# EAGLE board panel (EAGLE 9.4.2)
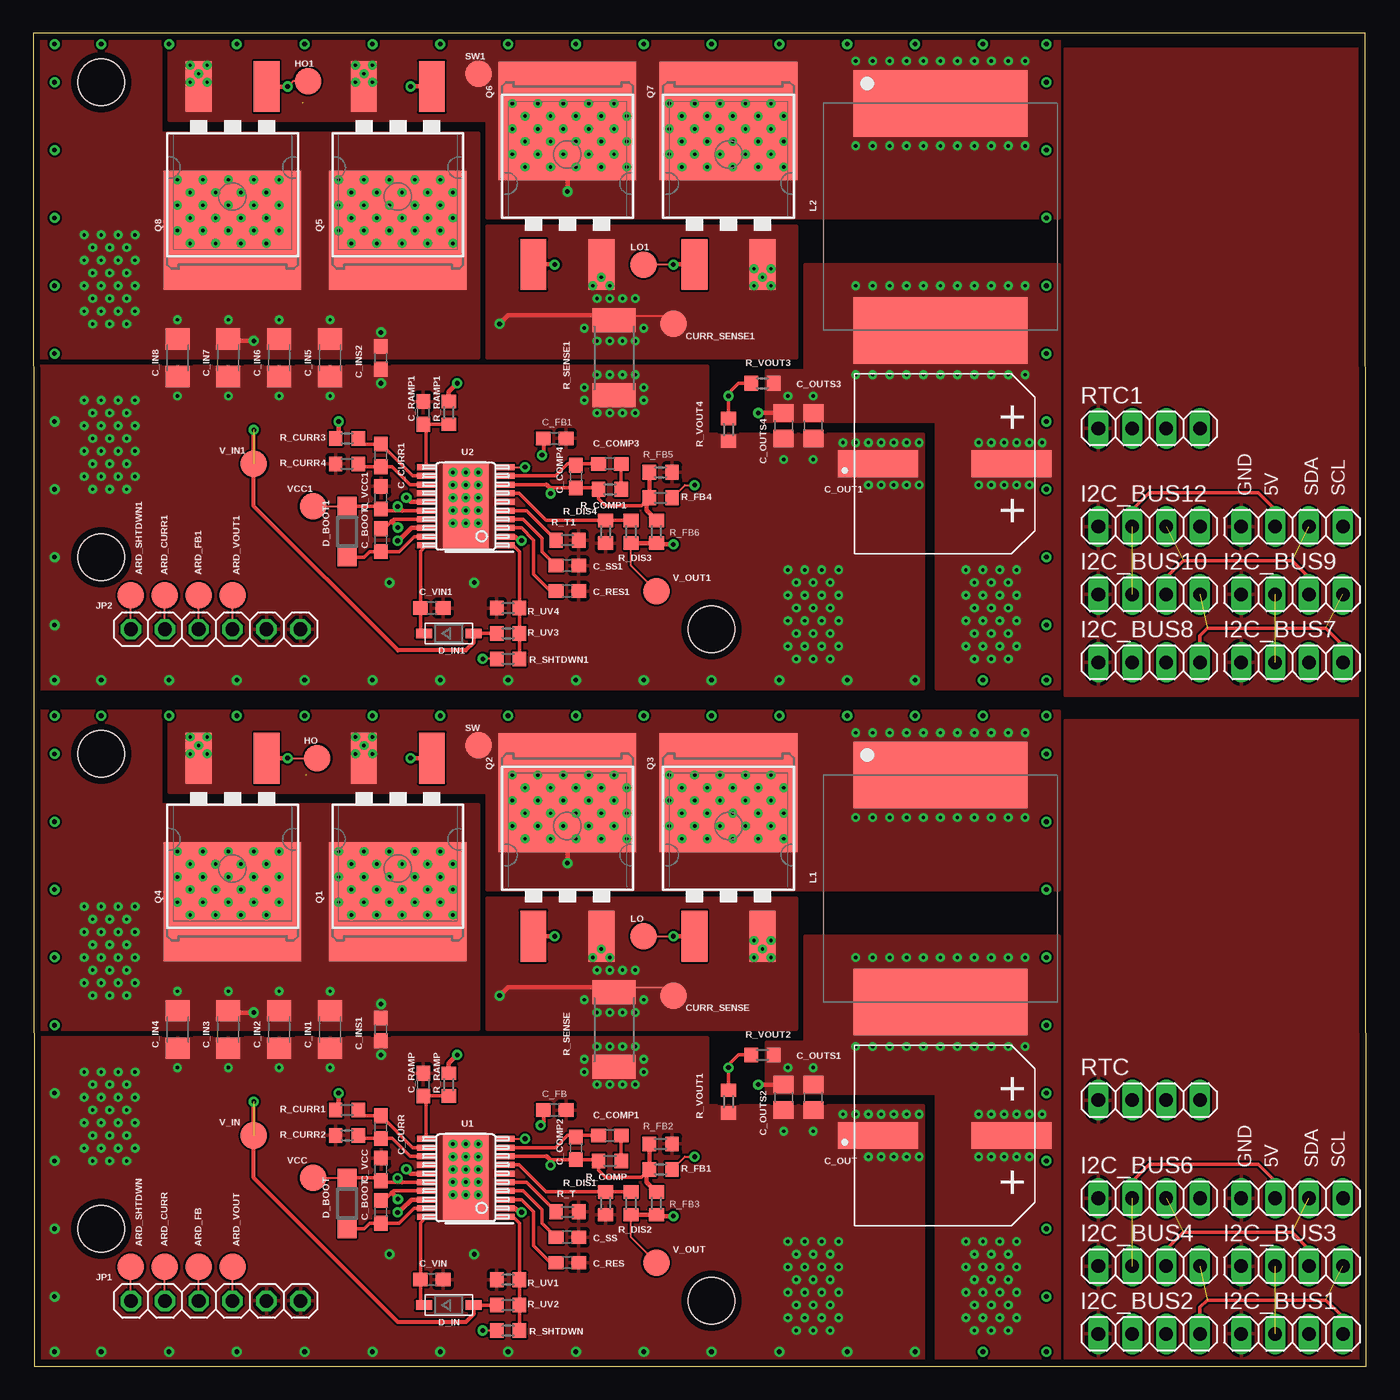
[diagram p0: board, top side]
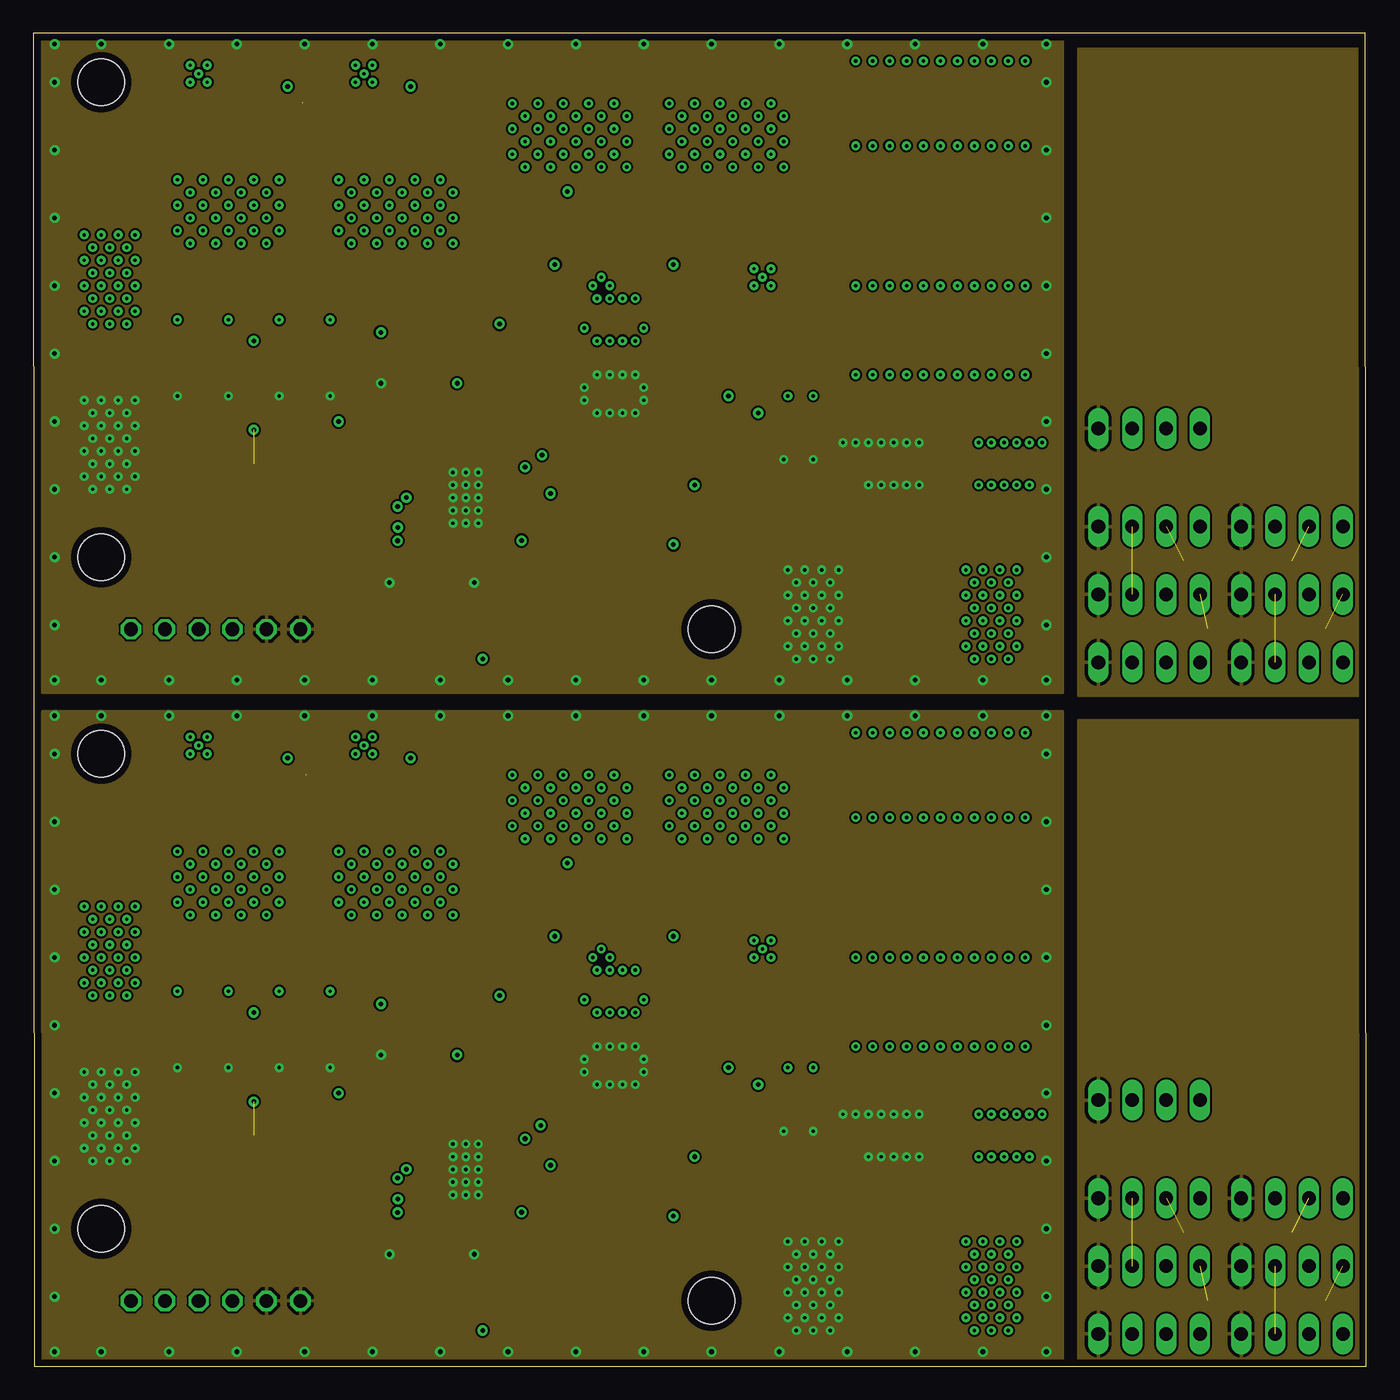
[diagram p1: board, inner layer Route2]
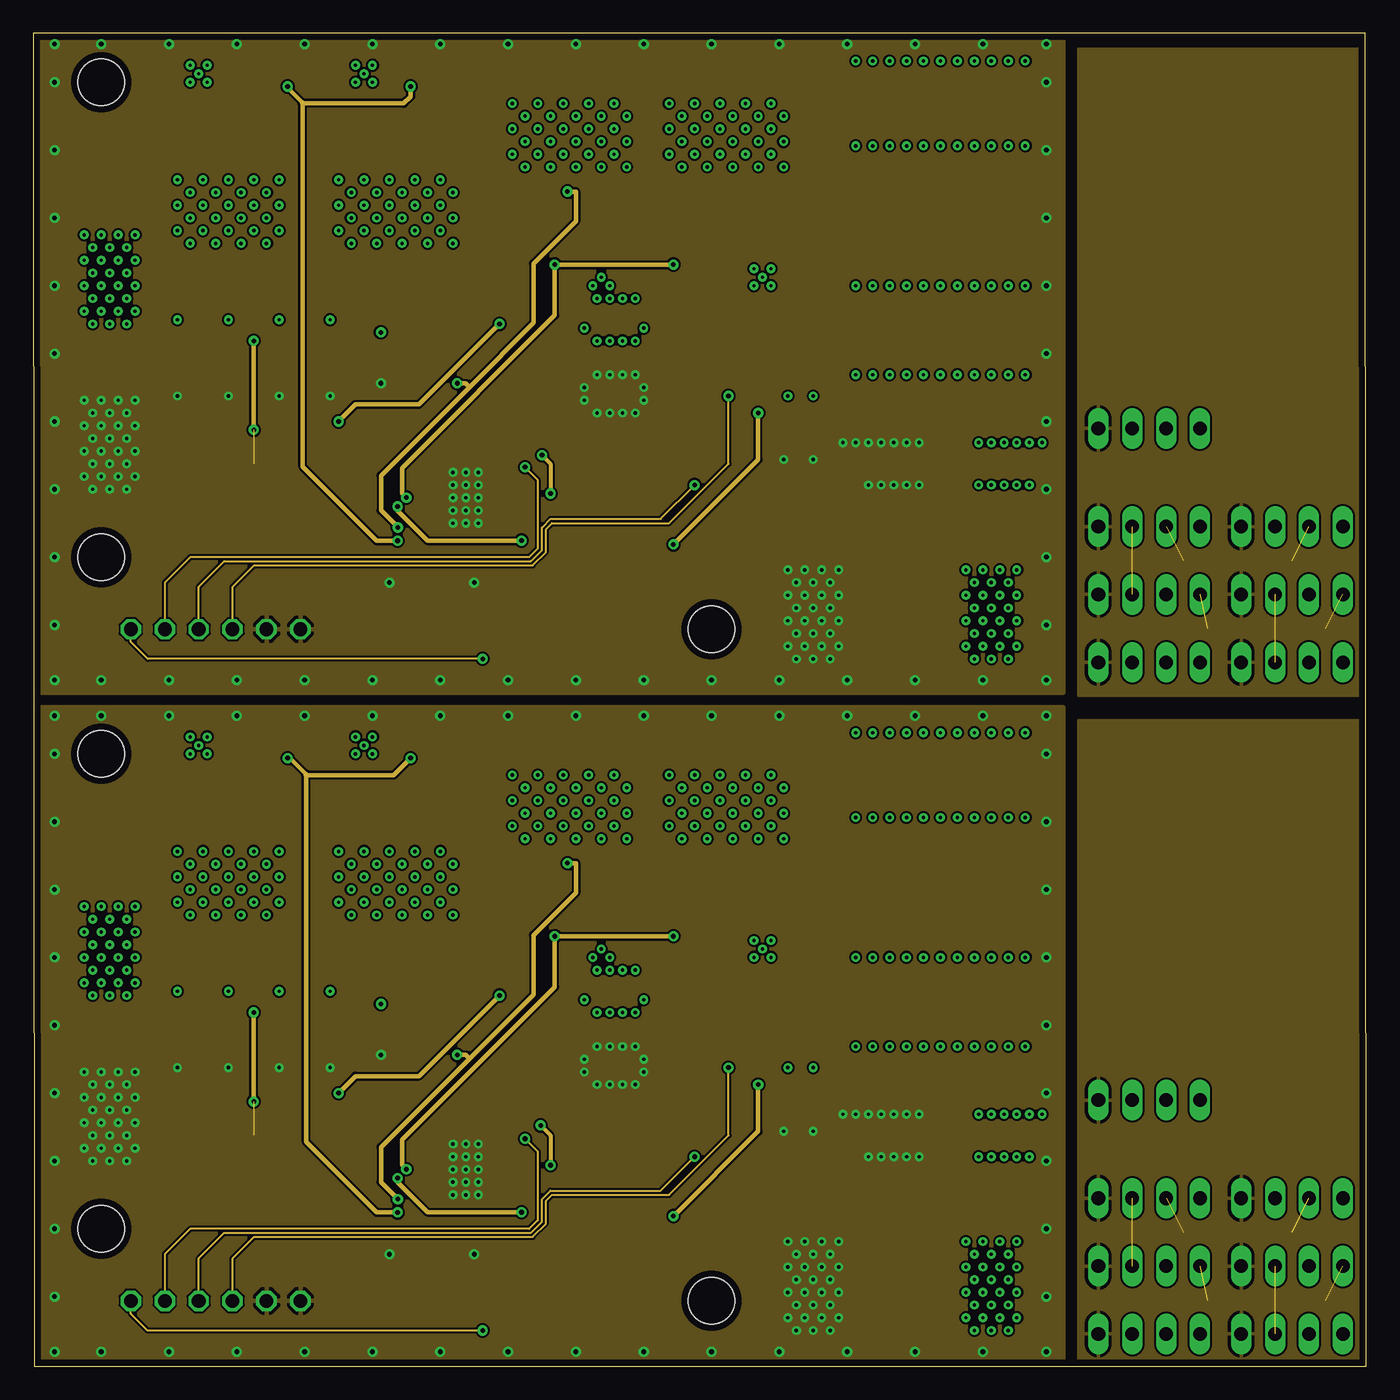
[diagram p2: board, inner layer Route15]
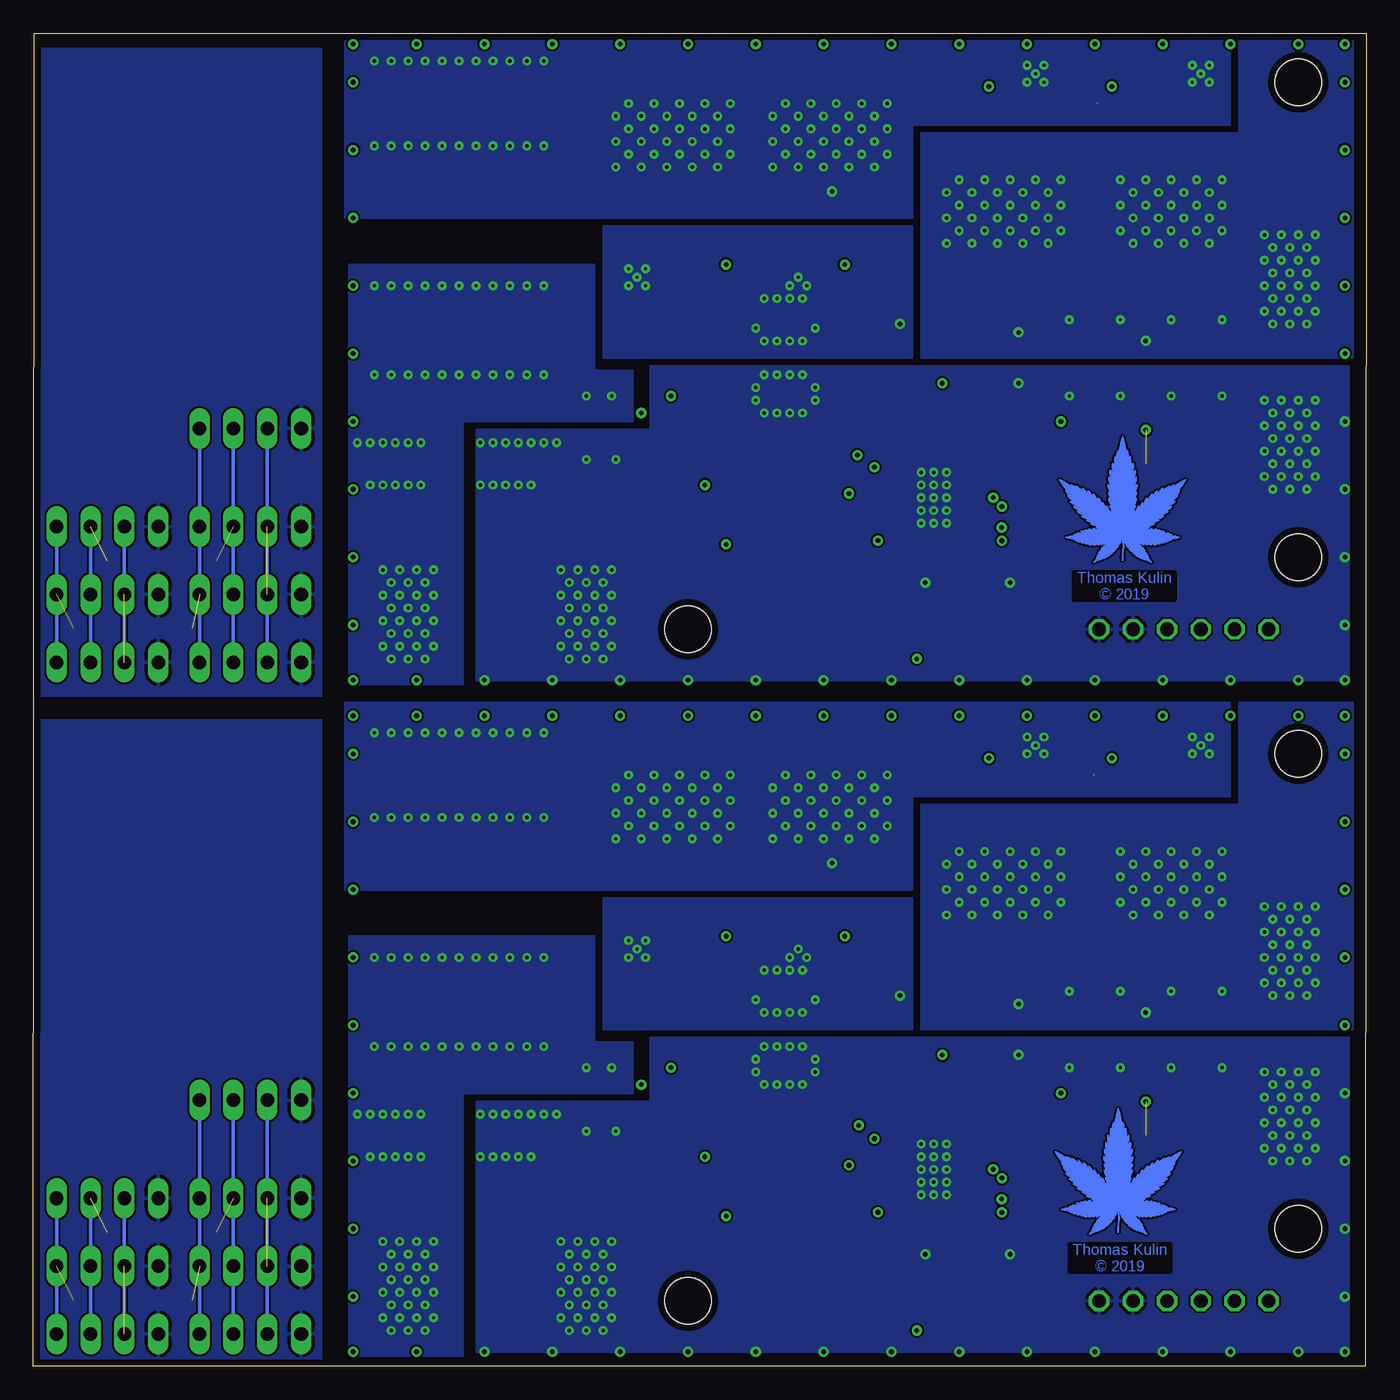
[diagram p3: board, bottom side, seen from below]

Size 99.83 x 99.82 mm. Coordinates in mm from the lower left corner, seen from the top.
Outline: 0.05,0 99.83,0 99.78,99.82 0,99.82 0.05,0
Copper layers (1+2*15+16): Top 0.035mm / dielectric 1.5mm / Route2 0.035mm / dielectric 0.15mm / Route15 0.035mm / dielectric 0.2mm / Bottom 0.035mm
Design rules "default *": minimum track width 6mil, minimum drill 0.2mm, track to track 6mil, track to pad 6mil, pad to pad 6mil, via to via 6mil, smd to smd 6mil, copper to edge 20mil, drill to drill 6mil, minimum pad ring 10mil, minimum via ring 8mil, stop-mask expansion 4mil, vias tented up to drill 0mil, thermal gap 10mil
Holes 3.48 mm at 50.8,4.91 5.08,45.87 5.08,10.31 50.8,55.2 5.08,96.16 5.08,60.6

## Footprints (pad centres in the part's own frame; a part is rotated, then mirrored left to right if it is on the bottom)
TP20R = smd 2 x 2: TP 0,0
C0603 = smd 1.1 x 1: 1 -0.85,0; 2 0.85,0
C1206 = smd 1.6 x 1.8: 1 -1.4,0; 2 1.4,0
CAP_PANASONIC_H13 = smd 6 x 2: P$1 -5,0; P$2 5,0
C0805 = smd 1.3 x 1.5: 1 -0.95,0; 2 0.95,0
SOD123 = smd 1.4 x 1.4: A 1.9,0; C -1.9,0
SOD-123 = smd 1.2 x 0.7: A 1.85,0; C -1.85,0
1X04 = drill 1.016 long: 1 -3.81,0; 2 -1.27,0; 3 1.27,0; 4 3.81,0
1X06 = drill 1.016 octagon: 1 -6.35,0; 2 -3.81,0; 3 -1.27,0; 4 1.27,0; 5 3.81,0; 6 6.35,0
17.5X17.5_INDUCTOR_SMD = smd 5 x 13: 1 0,0; 2 17,0
D2PAK = smd 1.93 x 3.81: 1 -2.55,-8.25; 3 2.55,-8.25 | smd 10.3 x 8.9: 2 0,2.5
R0603 = smd 1 x 1.1: 1 -0.85,0; 2 0.85,0
R2512 = smd 1.8 x 3.2: 1 -2.8,0; 2 2.8,0
PWP0020A = smd 1.4 x 0.45: 1 -2.95,2.925; 2 -2.95,2.275; 3 -2.95,1.625; 4 -2.95,0.975; 5 -2.95,0.325; 6 -2.95,-0.325; 7 -2.95,-0.975; 8 -2.95,-1.625; 9 -2.95,-2.275; 10 -2.95,-2.925; 11 2.95,-2.925; 12 2.95,-2.275; 13 2.95,-1.625; 14 2.95,-0.975; 15 2.95,-0.325; 16 2.95,0.325; 17 2.95,0.975; 18 2.95,1.625; 19 2.95,2.275; 20 2.95,2.925 | smd 3.4 x 6.5: 21 0,0

## Placement (x,y rotation side)
ARD_CURR  PTR1TP20R  [TP20R]  9.84,7.45 0 top
ARD_CURR1  PTR1TP20R  [TP20R]  9.84,57.74 0 top
ARD_FB  PTR1TP20R  [TP20R]  12.38,7.45 0 top
ARD_FB1  PTR1TP20R  [TP20R]  12.38,57.74 0 top
ARD_SHTDWN  PTR1TP20R  [TP20R]  7.3,7.45 0 top
ARD_SHTDWN1  PTR1TP20R  [TP20R]  7.3,57.74 0 top
ARD_VOUT  PTR1TP20R  [TP20R]  14.92,7.45 0 top
ARD_VOUT1  PTR1TP20R  [TP20R]  14.92,57.74 0 top
C_BOOT  470 nF 50V  [C0603]  26.04,11.58 90 top
C_BOOT1  470 nF 50V  [C0603]  26.04,61.87 90 top
C_COMP1  1.2 nF  [C0603]  43.18,17.29 0 top
C_COMP2  82 pF  [C0603]  40.64,16.34 270 top
C_COMP3  1.2 nF  [C0603]  43.18,67.58 0 top
C_COMP4  82 pF  [C0603]  40.64,66.63 270 top
C_CURR  100 pF  [C0603]  26.04,17.93 270 top
C_CURR1  100 pF  [C0603]  26.04,68.22 270 top
C_FB  0.68 uF  [C0603]  39.05,19.2 0 top
C_FB1  0.68 uF  [C0603]  39.05,69.49 0 top
C_IN1  10 uF  [C1206]  22.23,25.23 270 top
C_IN2  10 uF  [C1206]  18.41,25.23 270 top
C_IN3  10 uF  [C1206]  14.61,25.23 270 top
C_IN4  10 uF  [C1206]  10.79,25.23 270 top
C_IN5  10 uF  [C1206]  22.23,75.52 270 top
C_IN6  10 uF  [C1206]  18.41,75.52 270 top
C_IN7  10 uF  [C1206]  14.61,75.52 270 top
C_IN8  10 uF  [C1206]  10.79,75.52 270 top
C_INS1  100 nF  [C0603]  26.04,25.23 270 top
C_INS2  100 nF  [C0603]  26.04,75.52 270 top
C_OUT  470 uF  [CAP_PANASONIC_H13]  68.26,17.29 0 top
C_OUT1  470 uF  [CAP_PANASONIC_H13]  68.26,67.58 0 top
C_OUTS1  1 uF  [C0805]  58.42,20.15 270 top
C_OUTS2  1 uF  [C0805]  56.2,20.15 270 top
C_OUTS3  1 uF  [C0805]  58.42,70.44 270 top
C_OUTS4  1 uF  [C0805]  56.2,70.44 270 top
C_RAMP  820pF 50V  [C0603]  29.21,21.1 90 top
C_RAMP1  820pF 50V  [C0603]  29.21,71.39 90 top
C_RES  1 uF  [C0603]  40.01,7.77 0 top
C_RES1  1 uF  [C0603]  40.01,58.06 0 top
C_SS  100 nF  [C0603]  40.01,9.67 0 top
C_SS1  100 nF  [C0603]  40.01,59.96 0 top
C_VCC  1 UF  [C0603]  26.04,14.75 90 top
C_VCC1  1 UF  [C0603]  26.04,65.04 90 top
C_VIN  1 UF  [C0603]  29.84,6.5 0 top
C_VIN1  1 UF  [C0603]  29.84,56.79 0 top
CURR_SENSE  PTR1TP20R  [TP20R]  47.94,27.77 0 top
CURR_SENSE1  PTR1TP20R  [TP20R]  47.94,78.06 0 top
D_BOOT  PMEG10010ELRX  [SOD123]  23.5,12.21 90 top
D_BOOT1  PMEG10010ELRX  [SOD123]  23.5,62.5 90 top
D_IN  IN4148  [SOD-123]  31.11,4.59 0 top
D_IN1  IN4148  [SOD-123]  31.11,54.88 0 top
HO  PTR1TP20R  [TP20R]  21.27,45.55 0 top
HO1  PTR1TP20R  [TP20R]  20.57,96.24 0 top
I2C_BUS1  [1X04]  94.28,2.43 0 top
I2C_BUS2  [1X04]  83.58,2.43 0 top
I2C_BUS3  [1X04]  94.28,7.51 0 top
I2C_BUS4  [1X04]  83.58,7.51 0 top
I2C_BUS5  [1X04]  94.28,12.59 0 top
I2C_BUS6  [1X04]  83.58,12.59 0 top
I2C_BUS7  [1X04]  94.28,52.72 0 top
I2C_BUS8  [1X04]  83.58,52.72 0 top
I2C_BUS9  [1X04]  94.28,57.8 0 top
I2C_BUS10  [1X04]  83.58,57.8 0 top
I2C_BUS11  [1X04]  94.28,62.88 0 top
I2C_BUS12  [1X04]  83.58,62.88 0 top
JP1  [1X06]  13.65,4.91 0 top
JP2  [1X06]  13.65,55.2 0 top
L1  [17.5X17.5_INDUCTOR_SMD]  67.94,44.28 270 top
L2  [17.5X17.5_INDUCTOR_SMD]  67.94,94.57 270 top
LO  PTR1TP20R  [TP20R]  45.72,32.21 0 top
LO1  PTR1TP20R  [TP20R]  45.72,82.51 0 top
Q1  IRF3205STRLPBF  [D2PAK]  27.3,37.29 180 top
Q2  IRF3205STRLPBF  [D2PAK]  40.01,40.47 0 top
Q3  IRF3205STRLPBF  [D2PAK]  52.07,40.47 0 top
Q4  IRF3205STRLPBF  [D2PAK]  14.92,37.29 180 top
Q5  IRF3205STRLPBF  [D2PAK]  27.3,87.59 180 top
Q6  IRF3205STRLPBF  [D2PAK]  40.01,90.76 0 top
Q7  IRF3205STRLPBF  [D2PAK]  52.07,90.76 0 top
Q8  IRF3205STRLPBF  [D2PAK]  14.92,87.59 180 top
R_COMP  28.7 K  [R0603]  43.18,15.39 0 top
R_COMP1  28.7 K  [R0603]  43.18,65.68 0 top
R_CURR1  100  [R0603]  23.5,19.2 180 top
R_CURR2  100  [R0603]  23.5,17.29 180 top
R_CURR3  100  [R0603]  23.5,69.49 180 top
R_CURR4  100  [R0603]  23.5,67.58 180 top
R_DIS1  3.3 K  [R0603]  42.86,12.21 270 top
R_DIS2  56 K  [R0603]  44.77,12.21 270 top
R_DIS3  56 K  [R0603]  44.77,62.5 270 top
R_DIS4  3.3 K  [R0603]  42.86,62.5 270 top
R_FB1  17 K  [R0603]  46.99,14.75 180 top
R_FB2  10 K  [R0603]  46.99,16.66 180 top
R_FB3  178 K  [R0603]  46.67,12.21 270 top
R_FB4  17 K  [R0603]  46.99,65.04 180 top
R_FB5  10 K  [R0603]  46.99,66.95 180 top
R_FB6  178 K  [R0603]  46.67,62.5 270 top
R_RAMP  180 KOhm  [R0603]  31.11,21.1 90 top
R_RAMP1  180 KOhm  [R0603]  31.11,71.39 90 top
R_SENSE  1W 5mOhm  [R2512]  43.5,25.23 270 top
R_SENSE1  1W 5mOhm  [R2512]  43.5,75.52 270 top
R_SHTDWN  1 K  [R0603]  35.56,2.69 0 top
R_SHTDWN1  1 K  [R0603]  35.56,52.98 0 top
R_T  12.1 K  [R0603]  40.01,11.58 180 top
R_T1  12.1 K  [R0603]  40.01,61.87 180 top
R_UV1  3.3 K  [R0603]  35.56,6.5 180 top
R_UV2  56 K  [R0603]  35.56,4.59 180 top
R_UV3  56 K  [R0603]  35.56,54.88 180 top
R_UV4  3.3 K  [R0603]  35.56,56.79 180 top
R_VOUT1  1 K  [R0603]  52.07,19.83 90 top
R_VOUT2  5 K  [R0603]  54.61,23.32 0 top
R_VOUT3  5 K  [R0603]  54.61,73.62 0 top
R_VOUT4  1 K  [R0603]  52.07,70.12 90 top
RTC  [1X04]  83.58,19.94 0 top
RTC1  [1X04]  83.58,70.23 0 top
SW  PTR1TP20R  [TP20R]  33.34,46.5 0 top
SW1  PTR1TP20R  [TP20R]  33.34,96.79 0 top
U1  Value  [PWP0020A]  32.38,14.12 180 top
U2  Value  [PWP0020A]  32.38,64.41 180 top
V_IN  PTR1TP20R  [TP20R]  16.51,17.29 0 top
V_IN1  PTR1TP20R  [TP20R]  16.51,67.58 0 top
V_OUT  PTR1TP20R  [TP20R]  46.67,7.77 0 top
V_OUT1  PTR1TP20R  [TP20R]  46.67,58.06 0 top
VCC  PTR1TP20R  [TP20R]  20.95,14.12 0 top
VCC1  PTR1TP20R  [TP20R]  20.95,64.41 0 top

## Library data of the parts
ARD_CURR ARD_CURR1 ARD_FB ARD_FB1 ARD_SHTDWN ARD_SHTDWN1 ARD_VOUT ARD_VOUT1 CURR_SENSE CURR_SENSE1 HO HO1 LO LO1 SW SW1 V_IN V_IN1 V_OUT V_OUT1 VCC VCC1 = testpad
C_BOOT C_BOOT1 C_IN4 C_IN8 C_OUTS1-C_OUTS4 C_RAMP C_RAMP1 C_VCC C_VCC1 C_VIN C_VIN1 = rcl; SPICEPREFIX: C
C_COMP1-C_COMP4 C_CURR C_CURR1 C_FB C_FB1 C_IN1-C_IN3 C_IN5-C_IN7 C_INS1 C_INS2 C_RES C_RES1 C_SS C_SS1 R_COMP R_COMP1 R_CURR1-R_CURR4 R_DIS1-R_DIS4 R_FB1-R_FB6 R_SHTDWN R_SHTDWN1 R_T R_T1 R_UV1-R_UV4 R_VOUT1-R_VOUT4 = rcl
C_OUT C_OUT1 L1 L2 = custom-parts
D_BOOT D_BOOT1 = diode
D_IN D_IN1 JP1 JP2 = adafruit
I2C_BUS1-I2C_BUS12 RTC RTC1 = pinhead
Q1-Q8 = mixed_components
R_RAMP R_RAMP1 R_SENSE R_SENSE1 = rcl; SPICEPREFIX: R
U1 U2 = AcceleratedDesigns_Lib; MANUFACTURER: Texas Instruments; PARTNUMBER: LM5117PMHXNOPB; REFDES: RefDes; TYPE: TYPE

## Nets
5V: I2C_BUS1.2 I2C_BUS2.2 I2C_BUS3.2 I2C_BUS4.2 I2C_BUS5.2 I2C_BUS6.2 RTC.2
5V1: I2C_BUS7.2 I2C_BUS8.2 I2C_BUS9.2 I2C_BUS10.2 I2C_BUS11.2 I2C_BUS12.2 RTC1.2
ARD_CURRENT: ARD_CURR.TP JP1.2 U1.10
ARD_CURRENT1: ARD_CURR1.TP JP2.2 U2.10
ARD_FEEDBACK: ARD_FB.TP JP1.3 R_FB1.1
ARD_FEEDBACK1: ARD_FB1.TP JP2.3 R_FB4.1
ARD_SHUTDOWN: ARD_SHTDWN.TP JP1.1 R_SHTDWN.1
ARD_SHUTDOWN1: ARD_SHTDWN1.TP JP2.1 R_SHTDWN1.1
ARD_VOUT: ARD_VOUT.TP JP1.4 R_VOUT1.2 R_VOUT2.1
ARD_VOUT1: ARD_VOUT1.TP JP2.4 R_VOUT3.1 R_VOUT4.2
GND: C_FB.2 C_IN1.2 C_IN2.2 C_IN3.2 C_IN4.2 C_INS1.2 C_OUT.P$1 C_OUTS1.2 C_OUTS2.2 C_RAMP.2 C_RES.2 C_SS.2 C_VCC.2 C_VIN.2 JP1.5 JP1.6 R_CURR2.2 R_DIS1.2 R_FB2.1 R_SENSE.2 R_T.1 R_UV1.2 R_VOUT1.1 U1.6 U1.14 U1.21
GND1: C_FB1.2 C_IN5.2 C_IN6.2 C_IN7.2 C_IN8.2 C_INS2.2 C_OUT1.P$1 C_OUTS3.2 C_OUTS4.2 C_RAMP1.2 C_RES1.2 C_SS1.2 C_VCC1.2 C_VIN1.2 JP2.5 JP2.6 R_CURR4.2 R_DIS4.2 R_FB5.1 R_SENSE1.2 R_T1.1 R_UV4.2 R_VOUT4.1 U2.6 U2.14 U2.21
GND2: I2C_BUS1.1 I2C_BUS2.1 I2C_BUS3.1 I2C_BUS4.1 I2C_BUS5.1 I2C_BUS6.1 RTC.1
GND3: I2C_BUS7.1 I2C_BUS8.1 I2C_BUS9.1 I2C_BUS10.1 I2C_BUS11.1 I2C_BUS12.1 RTC1.1
N$1: C_VCC.1 D_BOOT.A U1.2 U1.16 VCC.TP
N$2: C_BOOT.1 D_BOOT.C U1.19
N$3: C_BOOT.2 L1.1 Q1.3 Q2.2 Q3.2 Q4.3 R_RAMP.2 SW.TP U1.17
N$4: CURR_SENSE.TP Q2.3 Q3.3 R_CURR1.2 R_SENSE.1
N$5: C_RAMP.1 R_RAMP.1 U1.11
N$6: C_VCC1.1 D_BOOT1.A U2.2 U2.16 VCC1.TP
N$7: LO.TP Q2.1 Q3.1 U1.15
N$8: HO.TP Q1.1 Q4.1 U1.18
N$9: C_COMP1.2 R_COMP.2
N$10: C_VIN.1 D_IN.C U1.20
N$11: R_SHTDWN.2 R_UV1.1 R_UV2.1 U1.1
N$12: C_BOOT1.1 D_BOOT1.C U2.19
N$13: R_DIS1.1 R_DIS2.1 U1.7
N$14: C_COMP1.1 C_COMP2.1 U1.9
N$15: C_COMP2.2 C_FB.1 R_COMP.1 R_FB1.2 R_FB2.2 R_FB3.1 U1.8
N$16: R_T.2 U1.5
N$17: C_RES.1 U1.3
N$18: C_SS.1 U1.4
N$19: C_CURR.1 R_CURR1.1 U1.12
N$20: C_CURR.2 R_CURR2.1 U1.13
N$21: C_IN1.1 C_IN2.1 C_IN3.1 C_IN4.1 C_INS1.1 D_IN.A Q1.2 Q4.2 R_UV2.2 V_IN.TP
N$22: C_BOOT1.2 L2.1 Q5.3 Q6.2 Q7.2 Q8.3 R_RAMP1.2 SW1.TP U2.17
N$23: CURR_SENSE1.TP Q6.3 Q7.3 R_CURR3.2 R_SENSE1.1
N$24: C_RAMP1.1 R_RAMP1.1 U2.11
N$25: LO1.TP Q6.1 Q7.1 U2.15
N$26: HO1.TP Q5.1 Q8.1 U2.18
N$27: R_SHTDWN1.2 R_UV3.1 R_UV4.1 U2.1
N$28: R_DIS3.1 R_DIS4.1 U2.7
N$29: C_COMP3.2 R_COMP1.2
N$30: C_COMP3.1 C_COMP4.1 U2.9
N$31: C_COMP4.2 C_FB1.1 R_COMP1.1 R_FB4.2 R_FB5.2 R_FB6.1 U2.8
N$32: R_T1.2 U2.5
N$33: C_SS1.1 U2.4
N$34: C_RES1.1 U2.3
N$35: C_CURR1.1 R_CURR3.1 U2.12
N$36: C_CURR1.2 R_CURR4.1 U2.13
N$37: C_VIN1.1 D_IN1.C U2.20
N$38: C_IN5.1 C_IN6.1 C_IN7.1 C_IN8.1 C_INS2.1 D_IN1.A Q5.2 Q8.2 R_UV3.2 V_IN1.TP
SCL: I2C_BUS1.4 I2C_BUS2.4 I2C_BUS3.4 I2C_BUS4.4 I2C_BUS5.4 I2C_BUS6.4 RTC.4
SCL1: I2C_BUS7.4 I2C_BUS8.4 I2C_BUS9.4 I2C_BUS10.4 I2C_BUS11.4 I2C_BUS12.4 RTC1.4
SDA: I2C_BUS1.3 I2C_BUS2.3 I2C_BUS3.3 I2C_BUS4.3 I2C_BUS5.3 I2C_BUS6.3 RTC.3
SDA1: I2C_BUS7.3 I2C_BUS8.3 I2C_BUS9.3 I2C_BUS10.3 I2C_BUS11.3 I2C_BUS12.3 RTC1.3
V_OUT: C_OUT.P$2 C_OUTS1.1 C_OUTS2.1 L1.2 R_DIS2.2 R_FB3.2 R_VOUT2.2 V_OUT.TP
V_OUT1: C_OUT1.P$2 C_OUTS3.1 C_OUTS4.1 L2.2 R_DIS3.2 R_FB6.2 R_VOUT3.2 V_OUT1.TP

## Tracks (layer width: path | path; a pad name or v marks a point on that pad's centre or on a via)
5V  (2 unrouted)
  Top 0.254: I2C_BUS6.2 82.31,13.86 83.58,15.13 91.74,15.13 93.01,13.86 I2C_BUS5.2
  Bottom 0.254: I2C_BUS2.2 I2C_BUS6.2 RTC.2 | I2C_BUS5.2 I2C_BUS1.2
5V1  (2 unrouted)
  Top 0.254: I2C_BUS12.2 82.31,64.15 83.58,65.42 91.74,65.42 93.01,64.15 I2C_BUS11.2
  Bottom 0.254: I2C_BUS8.2 I2C_BUS12.2 RTC1.2 | I2C_BUS11.2 I2C_BUS7.2
ARD_CURRENT  (via drill 0.35)
  Top 0.152: U1.10 v36.83,17.05 | JP1.2 ARD_CURR.TP
  Route15 0.152: v36.83,17.05 37.78,16.1 37.78,10.94 37.15,10.31 11.75,10.31 9.84,8.4 JP1.2
ARD_CURRENT1  (via drill 0.35)
  Top 0.152: U2.10 v36.83,67.34 | JP2.2 ARD_CURR1.TP
  Route15 0.152: v36.83,67.34 37.78,66.39 37.78,61.23 37.15,60.6 11.75,60.6 9.84,58.69 JP2.2
ARD_FEEDBACK  (via drill 0.35)
  Top 0.152: R_FB1.1 48.79,15.7 v49.53,15.7 | JP1.3 ARD_FB.TP
  Route15 0.152: JP1.3 12.38,8.08 14.3,10 37.27,10 38.09,10.82 38.09,12.52 38.73,13.16 46.99,13.16 v49.53,15.7
ARD_FEEDBACK1  (via drill 0.35)
  Top 0.152: R_FB4.1 48.79,66 v49.53,66 | JP2.3 ARD_FB1.TP
  Route15 0.152: JP2.3 12.38,58.38 14.3,60.29 37.27,60.29 38.09,61.11 38.09,62.81 38.73,63.46 46.99,63.46 v49.53,66
ARD_SHUTDOWN  (via drill 0.35)
  Top 0.152: R_SHTDWN.1 v33.66,2.69 | JP1.1 ARD_SHTDWN.TP
  Route15 0.152: v33.66,2.69 8.57,2.69 7.3,3.96 JP1.1
ARD_SHUTDOWN1  (via drill 0.35)
  Top 0.152: R_SHTDWN1.1 v33.66,52.98 | JP2.1 ARD_SHTDWN1.TP
  Route15 0.152: v33.66,52.98 8.57,52.98 7.3,54.25 JP2.1
ARD_VOUT  (via drill 0.35)
  Top 0.152: JP1.4 ARD_VOUT.TP
  Top 0.254: R_VOUT2.1 52.81,23.32 52.07,22.59 v52.07,22.37 R_VOUT1.2
  Route15 0.152: JP1.4 14.92,8.08 16.54,9.7 37.4,9.7 38.39,10.69 38.39,12.39 38.85,12.85 47.62,12.85 52.07,17.29 v52.07,22.37
ARD_VOUT1  (via drill 0.35)
  Top 0.152: JP2.4 ARD_VOUT1.TP
  Top 0.254: R_VOUT3.1 52.81,73.62 52.07,72.88 v52.07,72.66 R_VOUT4.2
  Route15 0.152: JP2.4 14.92,58.38 16.54,59.99 37.4,59.99 38.39,60.98 38.39,62.68 38.85,63.14 47.62,63.14 52.07,67.58 v52.07,72.66
GND  (via drill 0.25, 0.35)
  other vias: 1.59,1.1 5.08,1.1 10.16,1.1 15.24,1.1 20.32,1.1 25.4,1.1 1.59,5.23 1.59,10.31 1.59,15.39 30.48,1.1 35.56,1.1 40.64,1.1 45.72,1.1 50.8,1.1 55.88,1.1 60.96,1.1 66.04,1.1 71.12,1.1 75.88,1.1 75.88,5.23 75.88,10.31 75.88,15.39 75.88,20.47 75.88,25.55 75.88,30.63 75.88,35.71 75.88,40.79 75.88,45.87 1.59,20.47 1.59,25.55 1.59,30.63 1.59,35.71 1.59,40.79 1.59,45.87 1.59,48.72 5.08,48.72 10.16,48.72 15.24,48.72 20.32,48.72 25.4,48.72 30.48,48.72 35.56,48.72 40.64,48.72 45.72,48.72 50.8,48.72 55.88,48.72 60.96,48.72 66.04,48.72 71.12,48.72 75.88,48.72 32.38,16.66 31.43,16.66 33.34,16.66 31.43,15.7 32.38,15.7 33.34,15.7 31.43,14.75 32.38,14.75 33.34,14.75 31.43,13.8 32.38,13.8 33.34,13.8 31.43,12.85 32.38,12.85 33.34,12.85 56.2,17.61 58.42,17.61 41.27,23.01 41.27,22.05 42.23,21.1 43.18,21.1 44.13,21.1 45.09,21.1 42.23,23.96 43.18,23.96 44.13,23.96 45.09,23.96 45.72,23.01 45.72,22.05 10.79,22.37 14.61,22.37 18.41,22.37 22.23,22.37 60.64,18.88 61.59,18.88 62.55,18.88 63.5,18.88 64.45,18.88 65.41,18.88 66.36,18.88 66.36,15.7 65.41,15.7 64.45,15.7 63.5,15.7 62.55,15.7 56.52,9.35 57.78,9.35 59.05,9.35 60.33,9.35 57.15,8.4 58.42,8.4 59.69,8.4 56.52,7.45 57.78,7.45 59.05,7.45 60.33,7.45 57.15,6.5 58.42,6.5 59.69,6.5 56.52,5.54 57.78,5.54 59.05,5.54 60.33,5.54 57.15,4.59 58.42,4.59 59.69,4.59 56.52,3.64 57.78,3.64 59.05,3.64 60.33,3.64 57.15,2.69 58.42,2.69 59.69,2.69 3.81,22.05 5.08,22.05 6.35,22.05 7.62,22.05 4.45,21.1 5.71,21.1 6.99,21.1 3.81,20.15 5.08,20.15 6.35,20.15 7.62,20.15 4.45,19.2 5.71,19.2 6.99,19.2 3.81,18.24 5.08,18.24 6.35,18.24 7.62,18.24 4.45,17.29 5.71,17.29 6.99,17.29 3.81,16.34 5.08,16.34 6.35,16.34 7.62,16.34 4.45,15.39 5.71,15.39 6.99,15.39 26.67,8.4 33.02,8.4 26.04,23.32
  pour Top: 0.32,24.59 50.48,24.59 50.48,19.51 66.67,19.51 66.67,0.46 0.32,0.46
  pour Route15: 0.32,49.36 77.15,49.36 77.15,0.15 0.32,0.15
  pour Route2: 0.64,49.04 0.64,0.15 77.15,0.15 77.15,49.04
  pour Bottom: 1.27,24.59 53.66,24.59 53.66,19.83 66.67,19.83 66.67,1.1 1.27,1.1
  pour Top (no thermals): 8.57,24.59 50.48,24.59 50.48,19.51 66.67,19.51 66.67,15.07 59.05,15.07 59.05,16.66 49.21,16.66 49.21,20.47 32.7,20.47 32.7,23.96 27.3,23.96 27.3,22.05 8.57,22.05
  pour Top (no thermals): 28.26,17.93 36.51,17.93 36.51,10.31 28.26,10.31
GND1  (via drill 0.25, 0.35)
  other vias: 1.59,51.39 5.08,51.39 10.16,51.39 15.24,51.39 20.32,51.39 25.4,51.39 1.59,55.52 1.59,60.6 1.59,65.68 30.48,51.39 35.56,51.39 40.64,51.39 45.72,51.39 50.8,51.39 55.88,51.39 60.96,51.39 66.04,51.39 71.12,51.39 75.88,51.39 75.88,55.52 75.88,60.6 75.88,65.68 75.88,70.76 75.88,75.84 75.88,80.92 75.88,86 75.88,91.08 75.88,96.16 1.59,70.76 1.59,75.84 1.59,80.92 1.59,86 1.59,91.08 1.59,96.16 1.59,99.02 5.08,99.02 10.16,99.02 15.24,99.02 20.32,99.02 25.4,99.02 30.48,99.02 35.56,99.02 40.64,99.02 45.72,99.02 50.8,99.02 55.88,99.02 60.96,99.02 66.04,99.02 71.12,99.02 75.88,99.02 32.38,66.95 31.43,66.95 33.34,66.95 31.43,66 32.38,66 33.34,66 31.43,65.04 32.38,65.04 33.34,65.04 31.43,64.09 32.38,64.09 33.34,64.09 31.43,63.14 32.38,63.14 33.34,63.14 56.2,67.9 58.42,67.9 41.27,73.3 41.27,72.35 42.23,71.39 43.18,71.39 44.13,71.39 45.09,71.39 42.23,74.25 43.18,74.25 44.13,74.25 45.09,74.25 45.72,73.3 45.72,72.35 10.79,72.66 14.61,72.66 18.41,72.66 22.23,72.66 60.64,69.17 61.59,69.17 62.55,69.17 63.5,69.17 64.45,69.17 65.41,69.17 66.36,69.17 66.36,66 65.41,66 64.45,66 63.5,66 62.55,66 56.52,59.65 57.78,59.65 59.05,59.65 60.33,59.65 57.15,58.69 58.42,58.69 59.69,58.69 56.52,57.74 57.78,57.74 59.05,57.74 60.33,57.74 57.15,56.79 58.42,56.79 59.69,56.79 56.52,55.84 57.78,55.84 59.05,55.84 60.33,55.84 57.15,54.88 58.42,54.88 59.69,54.88 56.52,53.93 57.78,53.93 59.05,53.93 60.33,53.93 57.15,52.98 58.42,52.98 59.69,52.98 3.81,72.35 5.08,72.35 6.35,72.35 7.62,72.35 4.45,71.39 5.71,71.39 6.99,71.39 3.81,70.44 5.08,70.44 6.35,70.44 7.62,70.44 4.45,69.49 5.71,69.49 6.99,69.49 3.81,68.54 5.08,68.54 6.35,68.54 7.62,68.54 4.45,67.58 5.71,67.58 6.99,67.58 3.81,66.63 5.08,66.63 6.35,66.63 7.62,66.63 4.45,65.68 5.71,65.68 6.99,65.68 26.67,58.69 33.02,58.69 26.04,73.62
  pour Top: 0.32,74.89 50.48,74.89 50.48,69.81 66.67,69.81 66.67,50.76 0.32,50.76
  pour Route15: 0.32,99.65 77.15,99.65 77.15,50.44 0.32,50.44
  pour Route2: 0.64,99.33 0.64,50.44 77.15,50.44 77.15,99.33
  pour Bottom: 1.27,74.89 53.66,74.89 53.66,70.12 66.67,70.12 66.67,51.39 1.27,51.39
  pour Top (no thermals): 8.57,74.89 50.48,74.89 50.48,69.81 66.67,69.81 66.67,65.36 59.05,65.36 59.05,66.95 49.21,66.95 49.21,70.76 32.7,70.76 32.7,74.25 27.3,74.25 27.3,72.35 8.57,72.35
  pour Top (rank 3, no thermals): 28.26,68.22 36.51,68.22 36.51,60.6 28.26,60.6
GND2
  pour Top: 77.23,-0.11 77.23,48.41 100.6,48.41 100.6,-0.11
  pour Route15: 78.23,-0.11 78.23,48.41 101.6,48.41 101.6,-0.11
  pour Bottom: 78.23,-0.11 78.23,48.41 101.6,48.41 101.6,-0.11
  pour Route2: 78.23,-0.11 78.23,48.41 101.6,48.41 101.6,-0.11
GND3
  pour Top: 77.23,50.18 77.23,98.7 100.6,98.7 100.6,50.18
  pour Route15: 78.23,50.18 78.23,98.7 101.6,98.7 101.6,50.18
  pour Bottom: 78.23,50.18 78.23,98.7 101.6,98.7 101.6,50.18
  pour Route2: 78.23,50.18 78.23,98.7 101.6,98.7 101.6,50.18
N$1  (via drill 0.35)
  Top 0.152: VCC.TP D_BOOT.A
  Top 0.254: U1.16 27.62,13.79 26.14,13.79 C_VCC.1 25.82,14.11 D_BOOT.A
  Top 0.356: 27.62,13.79 27.32,14.1 v27.29,14.1 | U1.2 36.08,11.84 36.37,11.55 v36.57,11.55
  Route15 0.356: v27.29,14.1 27.29,13.78 29.52,11.55 v36.57,11.55
N$2
  Top 0.254: U1.19 28.52,11.84 27.41,10.73 C_BOOT.1 25.18,10.73 24.77,10.31 D_BOOT.C
N$3  (via drill 0.25, 0.35)
  Top 0.254: U1.17 26.96,13.14 26.83,13.01 26.14,12.32 C_BOOT.2
  Top 0.356: Q2.2 v40.01,37.68 | v27.3,12.53 26.83,13.01 | R_RAMP.2 31.11,22.69 v31.75,23.32
  Route15 0.356: v40.01,37.68 40.64,37.68 40.64,35.46 37.47,32.29 37.47,27.84 32.67,23.04 | 32.67,23.04 26.04,16.41 26.04,13.8 v27.3,12.53 | 32.67,23.04 32.38,23.32 v31.75,23.32
  other vias: 35.88,44.28 36.83,43.33 37.78,44.28 38.73,43.33 39.69,44.28 40.64,43.33 41.59,44.28 42.55,43.33 43.5,44.28 44.45,43.33 35.88,42.37 37.78,42.37 39.69,42.37 41.59,42.37 43.5,42.37 36.83,41.42 38.73,41.42 40.64,41.42 42.55,41.42 44.45,41.42 43.5,40.47 41.59,40.47 39.69,40.47 37.78,40.47 35.88,40.47 36.83,39.52 38.73,39.52 40.64,39.52 42.55,39.52 44.45,39.52 47.62,44.28 48.58,43.33 49.53,44.28 50.48,43.33 51.44,44.28 52.39,43.33 53.34,44.28 54.29,43.33 55.24,44.28 56.2,43.33 47.62,42.37 49.53,42.37 51.44,42.37 53.34,42.37 55.24,42.37 48.58,41.42 50.48,41.42 52.39,41.42 54.29,41.42 56.2,41.42 55.24,40.47 53.34,40.47 51.44,40.47 49.53,40.47 47.62,40.47 48.58,39.52 50.48,39.52 52.39,39.52 54.29,39.52 56.2,39.52 61.59,47.45 62.87,47.45 64.14,47.45 65.41,47.45 66.67,47.45 67.94,47.45 69.22,47.45 70.48,47.45 71.75,47.45 73.03,47.45 74.3,47.45 61.59,41.1 62.87,41.1 64.14,41.1 65.41,41.1 66.67,41.1 67.94,41.1 69.22,41.1 70.48,41.1 71.75,41.1 73.03,41.1 74.3,41.1 11.75,47.14 13.02,47.14 12.38,46.5 11.75,45.87 13.02,45.87 24.13,47.14 25.4,47.14 24.77,46.5 24.13,45.87 25.4,45.87
  pour Top (no thermals): 10.16,49.04 10.16,43.01 33.97,43.01 33.97,35.71 76.83,35.71 76.83,49.04
  pour Bottom: 10.16,49.68 76.52,49.68 76.52,35.71 33.97,35.71 33.97,42.69 10.16,42.69
N$4  (via drill 0.25, 0.35)
  Top 0.152: R_SENSE.1 43.81,28.35 47.37,28.35 CURR_SENSE.TP
  Top 0.356: R_CURR1.2 22.86,19.41 v22.86,20.47 | v34.92,27.77 35.56,28.4 43.12,28.4 R_SENSE.1
  Route15 0.356: v22.86,20.47 24.13,21.74 28.89,21.74 v34.92,27.77
  other vias: 41.27,27.45 45.72,27.45 42.23,29.67 45.09,29.67 42.23,26.5 43.18,26.5 44.13,26.5 45.09,26.5 41.91,30.63 43.18,30.63 42.55,31.26 53.98,30.63 55.24,30.63 54.61,31.26 53.98,31.9 55.24,31.9 43.18,29.67 44.13,29.67
  pour Top (no thermals): 33.97,35.07 33.97,25.23 57.15,25.23 57.15,35.07
  pour Bottom: 33.97,35.07 57.15,35.07 57.15,25.23 33.97,25.23
N$5
  Top 0.254: U1.11 29.43,20.03 C_RAMP.1 R_RAMP.1
N$6  (via drill 0.35)
  Top 0.152: VCC1.TP D_BOOT1.A
  Top 0.254: U2.16 27.62,64.08 26.14,64.08 C_VCC1.1 25.82,64.4 D_BOOT1.A
  Top 0.356: 27.62,64.08 27.32,64.39 v27.29,64.39 | U2.2 36.08,62.13 36.37,61.84 v36.57,61.84
  Route15 0.356: v27.29,64.39 27.29,64.07 29.52,61.84 v36.57,61.84
N$7  (via drill 0.35)
  Top 0.152: LO.TP v47.94,32.22
  Top 0.356: Q2.1 v39.05,32.22 v39.05,32.21 | v47.94,32.21 v47.94,32.22 Q3.1 | v27.94,14.77 28.27,14.44 U1.15
  Route15 0.356: v47.94,32.21 v39.05,32.21 39.05,28.4 27.62,16.97 27.62,15.08 v27.94,14.77
N$8  (via drill 0.35)  (1 unrouted)
  Top 0.152: v19.05,45.55 HO.TP
  Top 0.356: Q4.1 v19.05,45.54 v19.05,45.55 | v28.26,45.55 Q1.1 | U1.18 28.31,12.49 27.6,11.78 27.53,11.78 v27.28,11.53
  Top 0.457: Q4.1
  Route15 0.305: 20.45,44.34 19.24,45.55 v19.05,45.55
  Route15 0.356: 20.38,44.28 26.99,44.28 v28.26,45.55 | v27.28,11.53 25.73,11.53 20.45,16.81 20.45,44.34
N$9
  Top 0.254: C_COMP1.2 R_COMP.2
N$10
  Top 0.254: U1.20 29,10.75 C_VIN.1 29,4.86 D_IN.C
N$11
  Top 0.254: U1.1 35.95,11.19 36.41,10.73 R_UV1.1 R_UV2.1 R_SHTDWN.2
N$12
  Top 0.254: U2.19 28.52,62.13 27.41,61.02 C_BOOT1.1 25.18,61.02 24.77,60.6 D_BOOT1.C
N$13
  Top 0.254: U1.7 36.39,15.09 38.42,13.06 R_DIS1.1 R_DIS2.1
N$14
  Top 0.254: U1.9 39.1,16.39 40.01,17.29 40.54,17.29 C_COMP2.1 40.74,17.29 C_COMP1.1
N$15  (via drill 0.35)
  Top 0.254: U1.8 38.42,15.74 38.51,15.74 38.76,15.49 C_COMP2.2 42.23,15.49 R_COMP.1 42.33,14.69 42.86,14.16 45.55,14.16 45.93,14.54 R_FB1.2
  Top 0.305: C_FB.1 38.2,18.25 v38,18.04 | v38.73,15.07 38.73,15.42 38.42,15.74
  Top 0.356: R_FB3.1 45.93,13.8 45.93,14.54 | R_FB1.2 R_FB2.2
  Route15 0.305: v38,18.04 38.73,17.31 v38.73,15.07
N$16
  Top 0.254: R_T.2 36.94,13.79 U1.5
N$17
  Top 0.254: U1.3 36.55,12.49 37.47,11.58 37.47,9.04 38.73,7.77 C_RES.1
N$18
  Top 0.254: U1.4 36.7,13.14 38.1,11.74 38.1,10.73 C_SS.1
N$19
  Top 0.254: U1.12 28.42,16.39 C_CURR.1 24.77,18.78 R_CURR1.1
N$20
  Top 0.254: U1.13 28.22,15.74 26.89,17.08 C_CURR.2 24.56,17.08 R_CURR2.1
N$21  (via drill 0.25, 0.35)  (1 unrouted)
  Top 0.254: R_UV2.2 D_IN.A
  Top 0.305: D_IN.A 32.97,3.9 32.38,3.32 27.3,3.32 16.51,14.12 v16.51,19.83
  Top 0.356: v16.51,26.5 14.73,26.5 C_IN3.1
  Route15 0.356: v16.51,19.83 v16.51,26.5
  other vias: 10.79,38.56 11.75,37.61 12.7,38.56 13.65,37.61 14.61,38.56 15.56,37.61 16.51,38.56 17.46,37.61 18.41,38.56 10.79,36.66 12.7,36.66 14.61,36.66 16.51,36.66 18.41,36.66 11.75,35.71 13.65,35.71 15.56,35.71 17.46,35.71 18.41,34.75 16.51,34.75 14.61,34.75 12.7,34.75 10.79,34.75 11.75,33.8 13.65,33.8 15.56,33.8 17.46,33.8 22.86,38.56 23.81,37.61 24.77,38.56 25.72,37.61 26.67,38.56 27.62,37.61 28.57,38.56 29.53,37.61 30.48,38.56 31.43,37.61 22.86,36.66 24.77,36.66 26.67,36.66 28.57,36.66 30.48,36.66 23.81,35.71 25.72,35.71 27.62,35.71 29.53,35.71 31.43,35.71 30.48,34.75 28.57,34.75 26.67,34.75 24.77,34.75 22.86,34.75 23.81,33.8 25.72,33.8 27.62,33.8 29.53,33.8 31.43,33.8 10.79,28.09 14.61,28.09 18.41,28.09 22.23,28.09 3.81,34.44 5.08,34.44 6.35,34.44 7.62,34.44 4.45,33.48 5.71,33.48 6.99,33.48 3.81,32.53 5.08,32.53 6.35,32.53 7.62,32.53 4.45,31.58 5.71,31.58 6.99,31.58 3.81,30.63 5.08,30.63 6.35,30.63 7.62,30.63 4.45,29.67 5.71,29.67 6.99,29.67 3.81,28.72 5.08,28.72 6.35,28.72 7.62,28.72 4.45,27.77 5.71,27.77 6.99,27.77 26.04,27.13
  pour Top (no thermals): 9.53,49.04 9.53,42.06 33.34,42.06 33.34,25.23 0.32,25.23 0.32,49.04
  pour Bottom: 0.95,49.68 9.53,49.68 9.53,42.06 33.34,42.06 33.34,25.23 0.95,25.23
N$22  (via drill 0.25, 0.35)
  Top 0.254: U2.17 26.96,63.43 26.83,63.3 26.14,62.61 C_BOOT1.2
  Top 0.356: Q6.2 v40.01,87.98 | v27.3,62.82 26.83,63.3 | R_RAMP1.2 31.11,72.98 v31.75,73.62
  Route15 0.356: v40.01,87.98 40.64,87.98 40.64,85.75 37.47,82.58 37.47,78.13 32.67,73.34 | 32.67,73.34 26.04,66.7 26.04,64.09 v27.3,62.82 | 32.67,73.34 32.38,73.62 v31.75,73.62
  other vias: 35.88,94.57 36.83,93.62 37.78,94.57 38.73,93.62 39.69,94.57 40.64,93.62 41.59,94.57 42.55,93.62 43.5,94.57 44.45,93.62 35.88,92.67 37.78,92.67 39.69,92.67 41.59,92.67 43.5,92.67 36.83,91.71 38.73,91.71 40.64,91.71 42.55,91.71 44.45,91.71 43.5,90.76 41.59,90.76 39.69,90.76 37.78,90.76 35.88,90.76 36.83,89.81 38.73,89.81 40.64,89.81 42.55,89.81 44.45,89.81 47.62,94.57 48.58,93.62 49.53,94.57 50.48,93.62 51.44,94.57 52.39,93.62 53.34,94.57 54.29,93.62 55.24,94.57 56.2,93.62 47.62,92.67 49.53,92.67 51.44,92.67 53.34,92.67 55.24,92.67 48.58,91.71 50.48,91.71 52.39,91.71 54.29,91.71 56.2,91.71 55.24,90.76 53.34,90.76 51.44,90.76 49.53,90.76 47.62,90.76 48.58,89.81 50.48,89.81 52.39,89.81 54.29,89.81 56.2,89.81 61.59,97.75 62.87,97.75 64.14,97.75 65.41,97.75 66.67,97.75 67.94,97.75 69.22,97.75 70.48,97.75 71.75,97.75 73.03,97.75 74.3,97.75 61.59,91.4 62.87,91.4 64.14,91.4 65.41,91.4 66.67,91.4 67.94,91.4 69.22,91.4 70.48,91.4 71.75,91.4 73.03,91.4 74.3,91.4 11.75,97.43 13.02,97.43 12.38,96.79 11.75,96.16 13.02,96.16 24.13,97.43 25.4,97.43 24.77,96.79 24.13,96.16 25.4,96.16
  pour Top (no thermals): 10.16,99.33 10.16,93.3 33.97,93.3 33.97,86 76.83,86 76.83,99.33
  pour Bottom: 10.16,99.97 76.52,99.97 76.52,86 33.97,86 33.97,92.98 10.16,92.98
N$23  (via drill 0.25, 0.35)
  Top 0.152: R_SENSE1.1 43.81,78.64 47.37,78.64 CURR_SENSE1.TP
  Top 0.356: R_CURR3.2 22.86,69.7 v22.86,70.76 | v34.92,78.06 35.56,78.7 43.12,78.7 R_SENSE1.1
  Route15 0.356: v22.86,70.76 24.13,72.03 28.89,72.03 v34.92,78.06
  other vias: 41.27,77.74 45.72,77.74 42.23,79.97 45.09,79.97 42.23,76.79 43.18,76.79 44.13,76.79 45.09,76.79 41.91,80.92 43.18,80.92 42.55,81.55 53.98,80.92 55.24,80.92 54.61,81.55 53.98,82.19 55.24,82.19 43.18,79.97 44.13,79.97
  pour Top (no thermals): 33.97,85.36 33.97,75.52 57.15,75.52 57.15,85.36
  pour Bottom: 33.97,85.36 57.15,85.36 57.15,75.52 33.97,75.52
N$24
  Top 0.254: U2.11 29.43,70.32 C_RAMP1.1 R_RAMP1.1
N$25  (via drill 0.35)
  Top 0.152: LO1.TP v47.94,82.51
  Top 0.356: Q6.1 v39.05,82.51 | v47.94,82.51 Q7.1 | v27.94,65.06 28.27,64.73 U2.15
  Route15 0.356: v47.94,82.51 v39.05,82.51 39.05,78.7 27.62,67.27 27.62,65.38 v27.94,65.06
N$26  (via drill 0.35)  (1 unrouted)
  Top 0.152: v19.05,95.84 19.45,96.24 HO1.TP
  Top 0.356: Q8.1 v19.05,95.84 | v28.26,95.84 Q5.1 | U2.18 28.31,62.78 27.6,62.07 27.53,62.07 v27.28,61.82
  Top 0.457: Q8.1
  Route15 0.305: 20.18,94.63 19.05,95.76 v19.05,95.84
  Route15 0.356: v28.26,95.84 28.26,95.08 27.75,94.57 20.13,94.57 | v27.28,61.82 25.73,61.82 20.18,67.37 20.18,94.63
N$27
  Top 0.254: U2.1 35.95,61.48 36.41,61.02 R_UV4.1 R_UV3.1 R_SHTDWN1.2
N$28
  Top 0.254: U2.7 36.39,65.38 38.42,63.35 R_DIS4.1 R_DIS3.1
N$29
  Top 0.254: C_COMP3.2 R_COMP1.2
N$30
  Top 0.254: U2.9 39.1,66.68 40.01,67.58 40.54,67.58 C_COMP4.1 40.74,67.58 C_COMP3.1
N$31  (via drill 0.35)
  Top 0.254: U2.8 38.42,66.03 38.51,66.03 38.76,65.78 C_COMP4.2 42.23,65.78 R_COMP1.1 42.33,64.98 42.86,64.45 45.55,64.45 45.93,64.83 R_FB4.2
  Top 0.305: C_FB1.1 38.2,68.34 v38.1,68.24 | v38.73,65.36 38.73,65.72 38.42,66.03
  Top 0.356: R_FB6.1 45.93,64.1 45.93,64.83 | R_FB4.2 R_FB5.2
  Route15 0.305: v38.1,68.24 38.73,67.6 v38.73,65.36
N$32
  Top 0.254: R_T1.2 36.94,64.08 U2.5
N$33
  Top 0.254: U2.4 36.7,63.43 38.1,62.03 38.1,61.02 C_SS1.1
N$34
  Top 0.254: U2.3 36.55,62.78 37.47,61.87 37.47,59.33 38.73,58.06 C_RES1.1
N$35
  Top 0.254: U2.12 28.42,66.68 C_CURR1.1 24.77,69.07 R_CURR3.1
N$36
  Top 0.254: U2.13 28.22,66.03 26.89,67.37 C_CURR1.2 24.56,67.37 R_CURR4.1
N$37
  Top 0.254: U2.20 29,61.04 C_VIN1.1 29,55.15 D_IN1.C
N$38  (via drill 0.25, 0.35)  (1 unrouted)
  Top 0.254: R_UV3.2 D_IN1.A
  Top 0.305: D_IN1.A 32.97,54.19 32.38,53.61 27.3,53.61 16.51,64.41 v16.51,70.12
  Top 0.356: v16.51,76.79 14.73,76.79 C_IN7.1
  Route15 0.356: v16.51,70.12 v16.51,76.79
  other vias: 10.79,88.86 11.75,87.9 12.7,88.86 13.65,87.9 14.61,88.86 15.56,87.9 16.51,88.86 17.46,87.9 18.41,88.86 10.79,86.95 12.7,86.95 14.61,86.95 16.51,86.95 18.41,86.95 11.75,86 13.65,86 15.56,86 17.46,86 18.41,85.05 16.51,85.05 14.61,85.05 12.7,85.05 10.79,85.05 11.75,84.09 13.65,84.09 15.56,84.09 17.46,84.09 22.86,88.86 23.81,87.9 24.77,88.86 25.72,87.9 26.67,88.86 27.62,87.9 28.57,88.86 29.53,87.9 30.48,88.86 31.43,87.9 22.86,86.95 24.77,86.95 26.67,86.95 28.57,86.95 30.48,86.95 23.81,86 25.72,86 27.62,86 29.53,86 31.43,86 30.48,85.05 28.57,85.05 26.67,85.05 24.77,85.05 22.86,85.05 23.81,84.09 25.72,84.09 27.62,84.09 29.53,84.09 31.43,84.09 10.79,78.38 14.61,78.38 18.41,78.38 22.23,78.38 3.81,84.73 5.08,84.73 6.35,84.73 7.62,84.73 4.45,83.78 5.71,83.78 6.99,83.78 3.81,82.82 5.08,82.82 6.35,82.82 7.62,82.82 4.45,81.87 5.71,81.87 6.99,81.87 3.81,80.92 5.08,80.92 6.35,80.92 7.62,80.92 4.45,79.97 5.71,79.97 6.99,79.97 3.81,79.01 5.08,79.01 6.35,79.01 7.62,79.01 4.45,78.06 5.71,78.06 6.99,78.06 26.04,77.43
  pour Top (no thermals): 9.53,99.33 9.53,92.35 33.34,92.35 33.34,75.52 0.32,75.52 0.32,99.33
  pour Bottom: 0.95,99.97 9.53,99.97 9.53,92.35 33.34,92.35 33.34,75.52 0.95,75.52
SCL  (2 unrouted)
  Top 0.254: I2C_BUS2.4 87.39,4.43 87.93,4.97 96.82,4.97 98.09,3.7 I2C_BUS1.4
  Bottom 0.254: I2C_BUS2.4 I2C_BUS6.4 RTC.4 | I2C_BUS5.4 I2C_BUS1.4
SCL1  (2 unrouted)
  Top 0.254: I2C_BUS8.4 87.39,54.72 87.93,55.26 96.82,55.26 98.09,53.99 I2C_BUS7.4
  Bottom 0.254: I2C_BUS8.4 I2C_BUS12.4 RTC1.4 | I2C_BUS11.4 I2C_BUS7.4
SDA  (2 unrouted)
  Top 0.254: I2C_BUS4.3 84.85,8.78 86.12,10.05 94.28,10.05 95.55,8.78 I2C_BUS3.3
  Bottom 0.254: I2C_BUS2.3 I2C_BUS6.3 RTC.3 | I2C_BUS5.3 I2C_BUS1.3
SDA1  (2 unrouted)
  Top 0.254: I2C_BUS10.3 84.85,59.07 86.12,60.34 94.28,60.34 95.55,59.07 I2C_BUS9.3
  Bottom 0.254: I2C_BUS8.3 I2C_BUS12.3 RTC1.3 | I2C_BUS11.3 I2C_BUS7.3
V_OUT  (via drill 0.25, 0.35)
  Top 0.152: V_OUT.TP 44.77,9.67 R_DIS2.2
  Top 0.356: v54.29,21.1 C_OUTS2.1 | v47.94,11.26 46.77,11.26 R_FB3.2 R_DIS2.2
  Route15 0.356: v54.29,21.1 54.29,17.61 v47.94,11.26
  other vias: 75.56,18.88 74.61,18.88 73.66,18.88 72.71,18.88 71.75,18.88 70.8,18.88 70.8,15.7 71.75,15.7 72.71,15.7 73.66,15.7 74.61,15.7 61.59,30.63 62.87,30.63 64.14,30.63 65.41,30.63 66.67,30.63 67.94,30.63 69.22,30.63 70.48,30.63 71.75,30.63 73.03,30.63 74.3,30.63 61.59,23.96 62.87,23.96 64.14,23.96 65.41,23.96 66.67,23.96 67.94,23.96 69.22,23.96 70.48,23.96 71.75,23.96 73.03,23.96 74.3,23.96 58.42,22.37 56.52,22.37 69.85,9.35 71.12,9.35 72.39,9.35 73.66,9.35 70.48,8.4 71.75,8.4 73.03,8.4 69.85,7.45 71.12,7.45 72.39,7.45 73.66,7.45 70.48,6.5 71.75,6.5 73.03,6.5 69.85,5.54 71.12,5.54 72.39,5.54 73.66,5.54 70.48,4.59 71.75,4.59 73.03,4.59 69.85,3.64 71.12,3.64 72.39,3.64 73.66,3.64 70.48,2.69 71.75,2.69 73.03,2.69
  pour Top (no thermals): 57.78,32.21 76.83,32.21 76.83,0.46 67.63,0.46 67.63,20.47 54.93,20.47 54.93,24.28 57.78,24.28
  pour Bottom: 57.78,32.21 76.2,32.21 76.2,0.78 67.63,0.78 67.63,20.47 54.93,20.47 54.93,24.28 57.78,24.28
V_OUT1  (via drill 0.25, 0.35)
  Top 0.152: V_OUT1.TP 44.77,59.96 R_DIS3.2
  Top 0.356: v54.29,71.39 C_OUTS4.1 | v47.94,61.55 46.77,61.55 R_FB6.2 R_DIS3.2
  Route15 0.356: v54.29,71.39 54.29,67.9 v47.94,61.55
  other vias: 75.56,69.17 74.61,69.17 73.66,69.17 72.71,69.17 71.75,69.17 70.8,69.17 70.8,66 71.75,66 72.71,66 73.66,66 74.61,66 61.59,80.92 62.87,80.92 64.14,80.92 65.41,80.92 66.67,80.92 67.94,80.92 69.22,80.92 70.48,80.92 71.75,80.92 73.03,80.92 74.3,80.92 61.59,74.25 62.87,74.25 64.14,74.25 65.41,74.25 66.67,74.25 67.94,74.25 69.22,74.25 70.48,74.25 71.75,74.25 73.03,74.25 74.3,74.25 58.42,72.66 56.52,72.66 69.85,59.65 71.12,59.65 72.39,59.65 73.66,59.65 70.48,58.69 71.75,58.69 73.03,58.69 69.85,57.74 71.12,57.74 72.39,57.74 73.66,57.74 70.48,56.79 71.75,56.79 73.03,56.79 69.85,55.84 71.12,55.84 72.39,55.84 73.66,55.84 70.48,54.88 71.75,54.88 73.03,54.88 69.85,53.93 71.12,53.93 72.39,53.93 73.66,53.93 70.48,52.98 71.75,52.98 73.03,52.98
  pour Top (no thermals): 57.78,82.51 76.83,82.51 76.83,50.76 67.63,50.76 67.63,70.76 54.93,70.76 54.93,74.57 57.78,74.57
  pour Bottom: 57.78,82.51 76.2,82.51 76.2,51.07 67.63,51.07 67.63,70.76 54.93,70.76 54.93,74.57 57.78,74.57
(copper drawn outside any net)
  shapes: Bottom area x1932

## Text on the board
Bottom: Thomas Kulin / © 2019 | Thomas Kulin / © 2019
tNames: GND | 5V | SDA | SCL | GND | 5V | SDA | SCL
vscore: V Score | V Score | V Score | V Score
_tNames: SW | HO | Q2 | Q3 | Thomas Kulin / © 2019 | L1 | Q4 | Q1 | LO | Thomas Kulin / © 2019 | C_INS1 | R_SENSE | CURR_SENSE | C_IN4 | C_IN3 | C_IN2 | C_IN1 | R_VOUT2 | C_OUTS1 | RTC | C_RAMP | R_RAMP | C_FB | R_CURR1 | C_CURR | C_COMP1 | R_FB2 | R_VOUT1 | V_IN | R_CURR2 | U1 | C_OUTS2 | VCC | C_OUT | C_COMP2 | R_COMP | R_FB1 | I2C_BUS6 | C_VCC | R_DIS1 | R_T | D_BOOT | R_FB3 | C_BOOT | C_SS | R_DIS2 | I2C_BUS4 | I2C_BUS3 | ARD_SHTDWN | ARD_CURR | ARD_FB | ARD_VOUT | V_OUT | C_VIN | C_RES | JP1 | R_UV1 | R_UV2 | I2C_BUS2 | I2C_BUS1 | D_IN | R_SHTDWN | SW | HO | Q2 | Q3 | Thomas Kulin / © 2019 | L1 | Q4 | Q1 | LO | Thomas Kulin / © 2019 | R_SENSE | CURR_SENSE | C_IN4 | C_IN3 | C_IN2 | C_IN1 | C_INS1 | R_VOUT2 | C_OUTS1 | RTC | C_RAMP | R_RAMP | R_CURR1 | C_FB | C_CURR | C_COMP1 | R_VOUT1 | V_IN | R_CURR2 | U1 | R_FB2 | C_OUTS2 | VCC | C_COMP2 | R_COMP | R_FB1 | C_OUT | I2C_BUS6 | C_VCC | R_DIS1 | R_T | R_FB3 | D_BOOT | C_BOOT | R_DIS2 | ARD_SHTDWN | ARD_CURR | ARD_FB | ARD_VOUT | C_SS | V_OUT | I2C_BUS4 | I2C_BUS3 | C_VIN | C_RES | JP1 | R_UV1 | R_UV2 | I2C_BUS2 | I2C_BUS1 | D_IN | R_SHTDWN